# Altium PCB Receptorpcb.PcbDoc
Units mil, origin at the board's own origin, x right, y up, seen from the top; angles counter-clockwise.
Board outline 3200 x 1900 mil, 2 copper layers (Top Layer, Bottom Layer); 11 components, 11 nets, 41 pads, 0 vias.
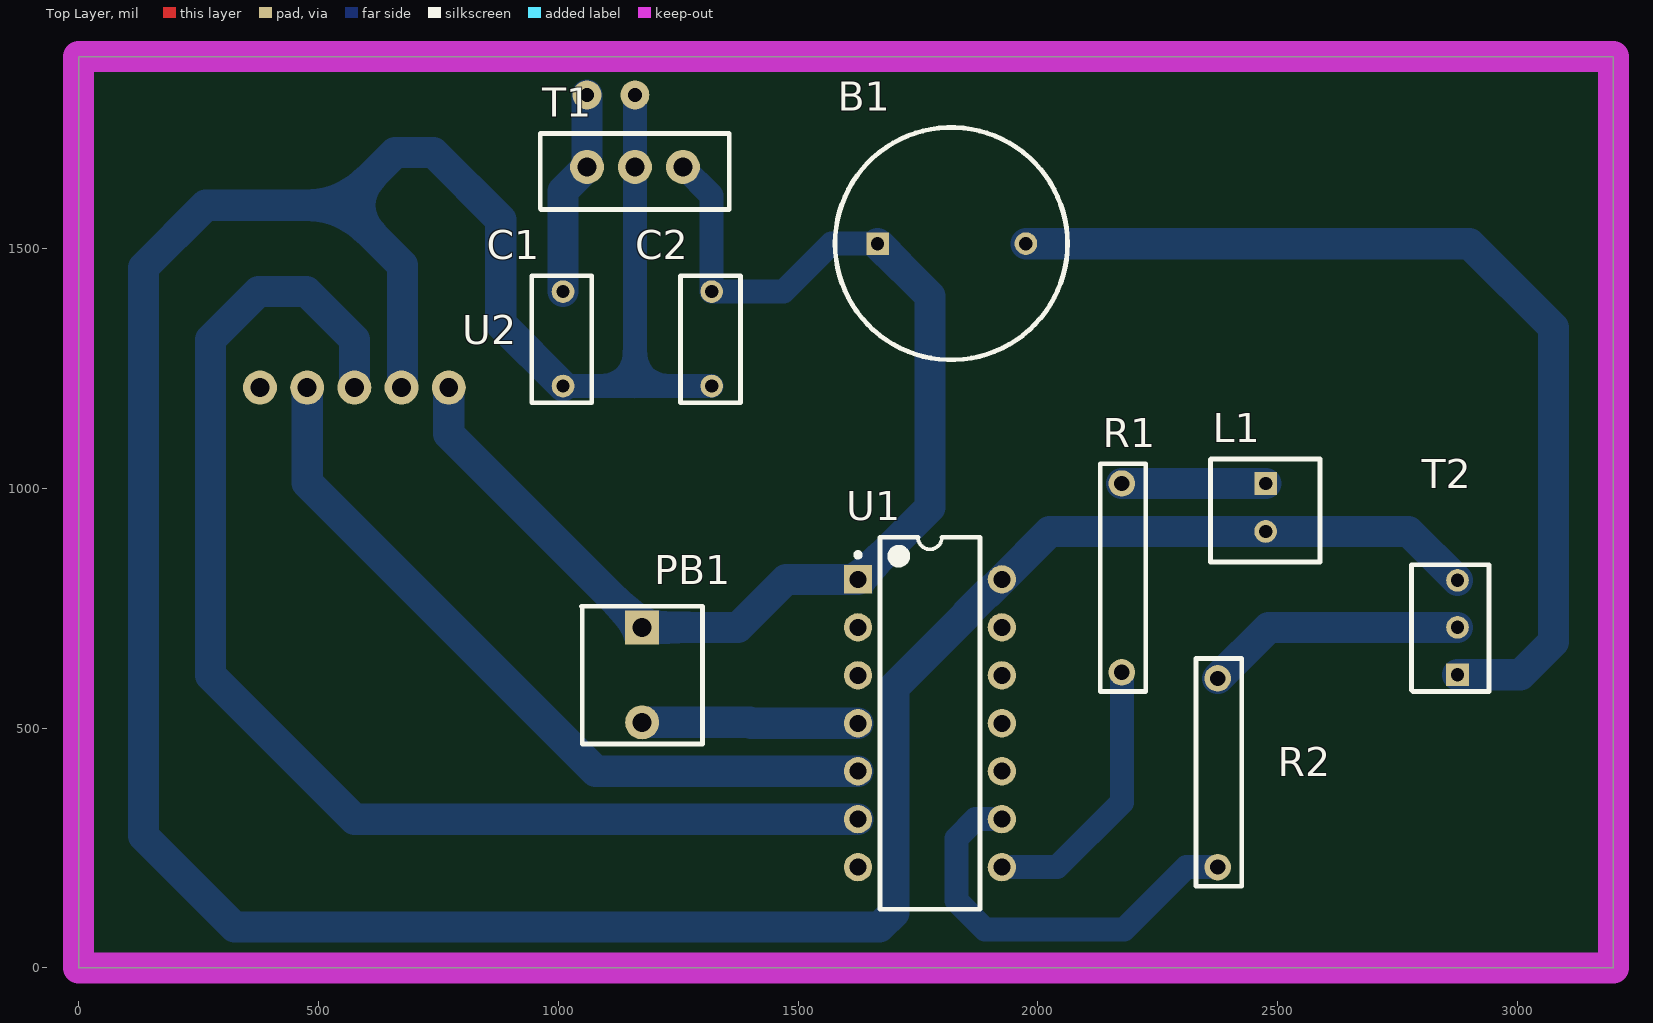
[diagram p0: Top Layer view]
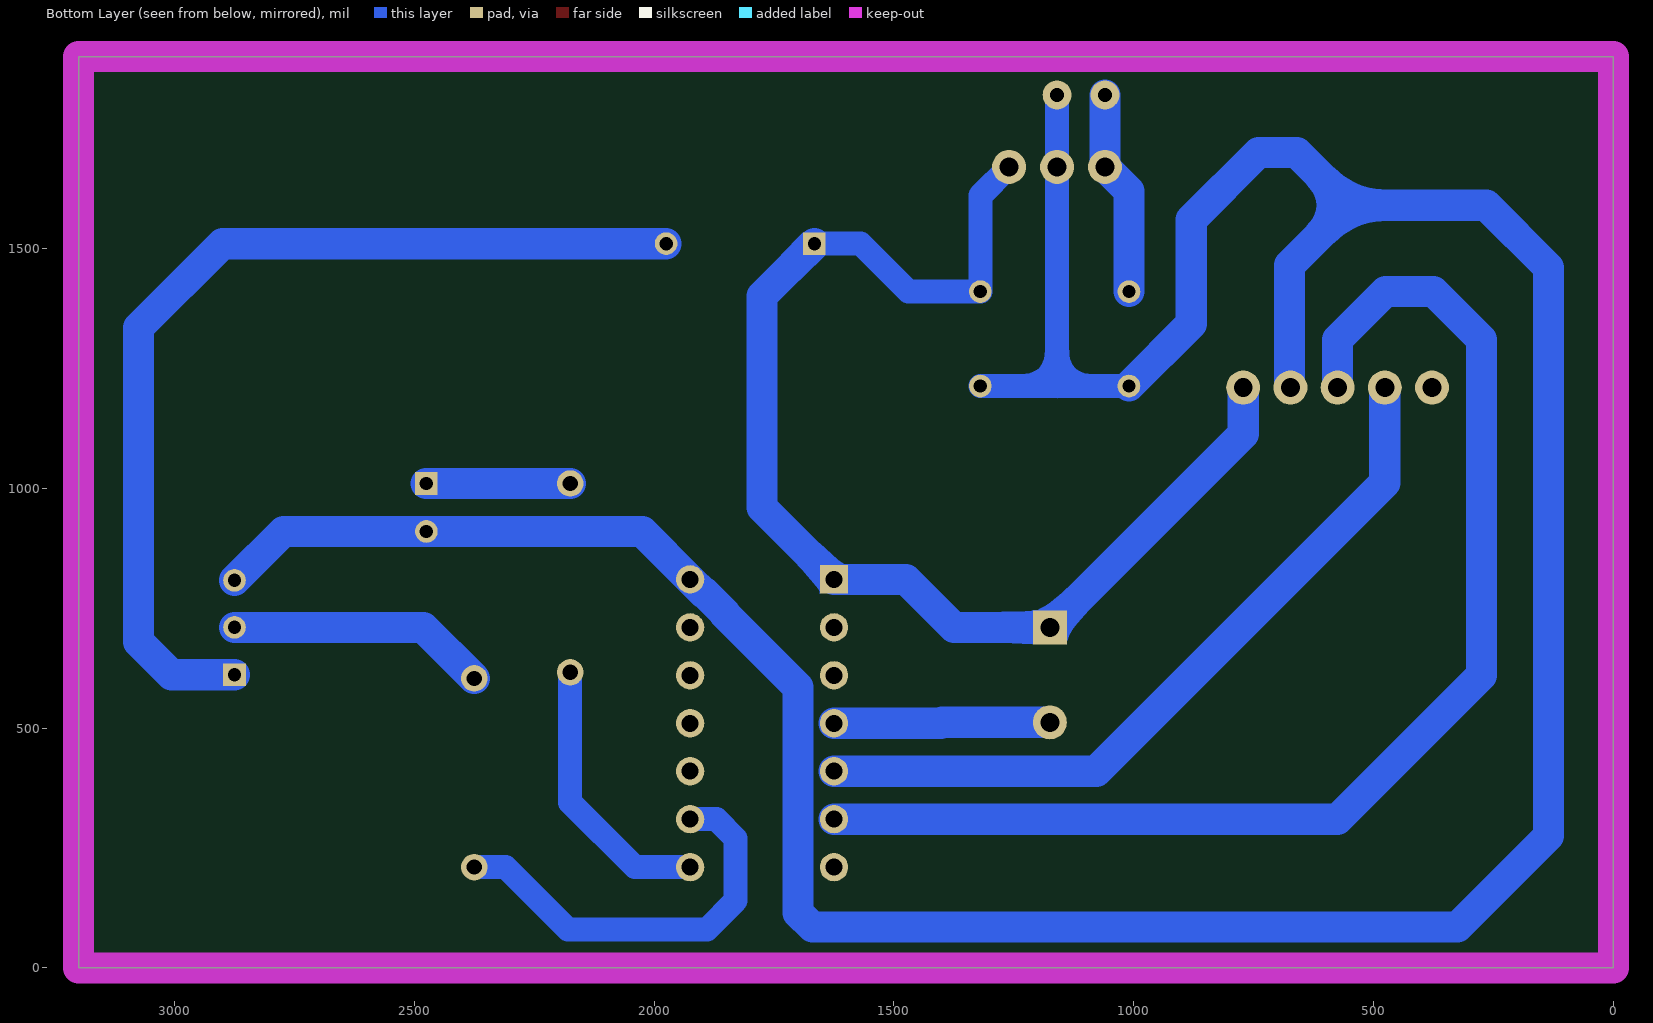
[diagram p1: Bottom Layer view, seen from below]
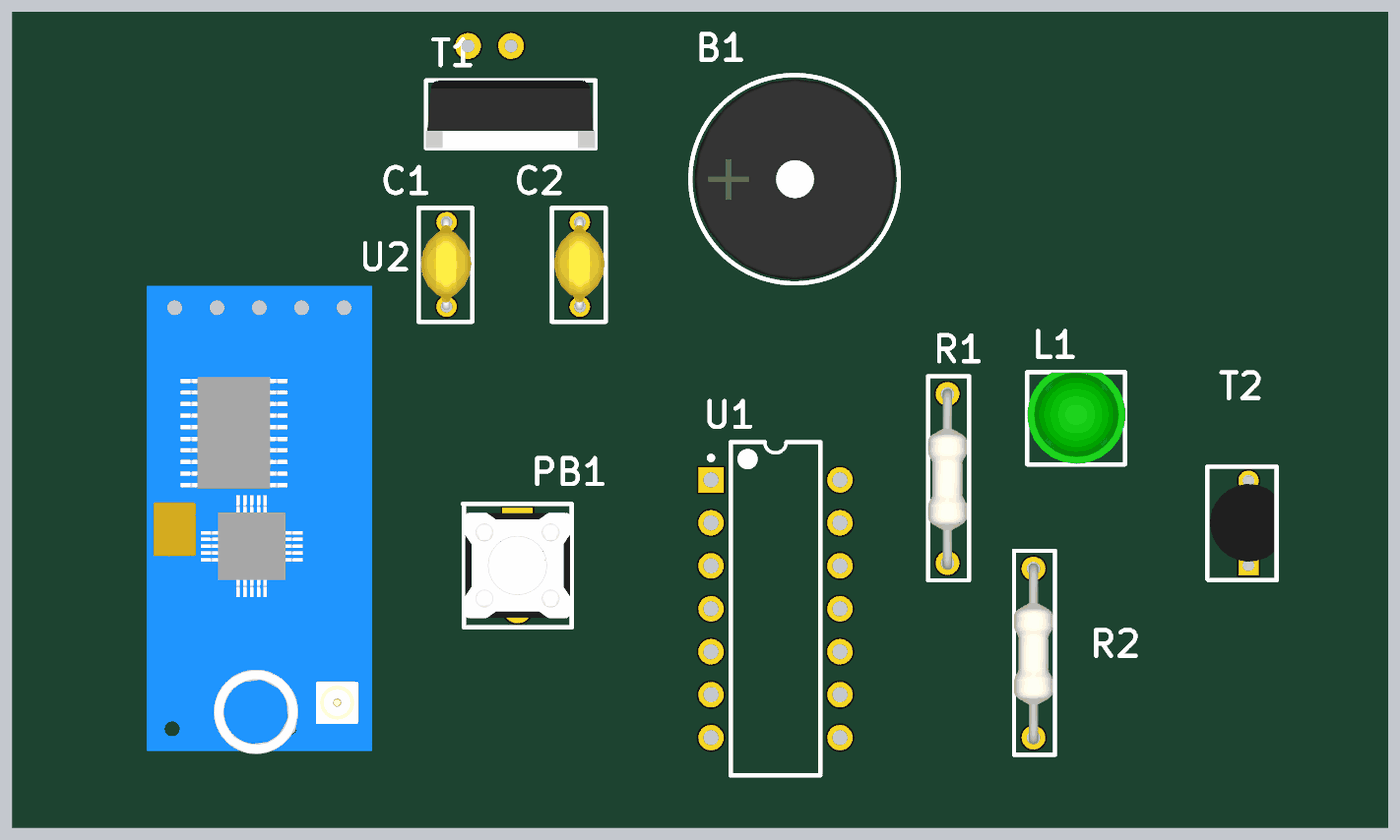
[diagram p2: 3D render of the assembled board from above, using the file's embedded part models]

## Layer stack, top to bottom
Top Solder: solder mask 0.4, Solder Resist, Dk 3.5
Top Layer: signal copper 1.4
Dielectric 1: dielectric 12.6, FR-4, Dk 4.8
Bottom Layer: signal copper 1.4
Bottom Solder: solder mask 0.4, Solder Resist, Dk 3.5

## Board outline
0,0 3200,0 3200,1900 0,1900

## Design rules (kind name [scope] priority, off if disabled: settings)
Clearance [All] p1: gap=10 ignorepadtopadclearanceinfootprint=FALSE
Height [All] p1: minheight=0 maxheight=1500 prefheight=500
PolygonConnect [All] p1: connectstyle=Relief reliefconductorwidth=10 reliefentries=4 polygonreliefangle="90 Angle" airgapwidth=10
RoutingLayers [All] p1: top layer_v5=FALSE bottom layer_v5=TRUE
RoutingVias [All] p1: holewidth=28 width=50 viastyle="Through Hole" minholewidth=28 minwidth=50 maxholewidth=28 maxwidth=50
SolderMaskExpansion [All] p1: expansion=4
UnRoutedNet [All] p1: checkbadconnections=TRUE
Width [All] p1: maxlimit=70 minlimit=50 preferedwidth=65
27 further rules are at their usual default settings.

## Components (designator, comment, footprint, x,y, rotation, side; value= is the part's Value field where it differs from the comment)
B1 "BUZZER" Buzzer 1665.94,1510 r0 top
C1 "Cap" RAD-0.3 1010,1213.15 r90 top value=100pF
C2 "Cap" RAD-0.3 1320,1213.15 r90 top value=100pF
L1 "LED" LED 2475,1010 r0 top
PB1 "Push Button 2-Pin" "Push Button" 1175,710 r0 top
R1 "Res1" AXIAL-0.3 2175,616.3 r90 top value=1K
R2 "Res1" AXIAL-0.3 2375,210 r90 top value=1K
T1 "LM7805" LM7805 1060,1670 r180 top
T2 "Transistor" 2N2222a 2875,611.19 r90 top
U1 "PIC16F688-I/P" PDIP300-P14 1775,510 r0 top
U2 "RF module" HC-12 378.15,1210 r0 top

## Footprints (in the part's own frame and the unit in brackets; to place one, negate y for a bottom-side part, rotate by r counter-clockwise, add the part's x,y. Pads: shape width x height; smd on the part's side, far side on the other; paste and mask are expansions set on the pad)
2N2222a [mm] "Transistor"
  rect 1.2x1.2 hole 0.7: 1(0,0)
  round 1.2 hole 0.7: 33(2.51,0) 34(5,0)
  silkscreen extent -0.88,-1.66 5.83,2.43, body extent -0.24,-1.53 5.26,2.27, height 8.25
AXIAL-0.3 [mm] "Axial Device, Thru-Hole; 2 Leads; 0.3 in Pin Spacing"
  round 1.4 hole 0.8: 1(0,0) 2(10,0)
  silkscreen extent -1.02,-1.27 11.05,1.14, body extent -0.4,-1.15 10.31,1.15, height 2.15
Buzzer [mm] "3.5-12V"
  rect 1.2x1.2 hole 0.7: 1(0,0)
  round 1.2 hole 0.7: 36(7.85,0)
  silkscreen extent -2.26,-6.15 10.06,6.15, body extent -2,-5.92 9.85,5.93, height 9.6
HC-12 [mm] "RF module"
  round 1.8 hole 1: 1(0,0) 2(2.5,0) 3(5,0) 4(7.5,0) 5(10,0)
  body extent -1.66,-26.38 11.64,1.32, height 25.9
LED [mm] "LED"
  rect 1.2x1.2 hole 0.7: 1(0,0)
  round 1.2 hole 0.7: 2(0,-2.54)
  silkscreen extent -2.92,-4.16 2.87,1.29, body extent -2.9,-4.13 2.9,1.27, height 9.2
LM7805 [mm] "Voltage Regulator"
  round 1.8 hole 1: Ground(-2.54,0) Input(0,0) Output(-5.08,0)
  silkscreen extent -7.53,-1.77 2.48,2.25, body extent -7.5,-1.79 2.5,2.22, height 20
PDIP300-P14 [mm] "DIP, 14-Leads, Row Spacing 7.62mm, Pitch 2.54mm, Body 19.2x6.6mm"
  rect 1.5x1.5 hole 0.9: 1(-3.81,7.62)
  round 1.5 hole 0.9: 2(-3.81,5.08) 3(-3.81,2.54) 4(-3.81,0) 5(-3.81,-2.54) 6(-3.81,-5.08) 7(-3.81,-7.62) 8(3.81,-7.62) 9(3.81,-5.08) 10(3.81,-2.54) 11(3.81,0) 12(3.81,2.54) 13(3.81,5.08) 14(3.81,7.62)
  silkscreen extent -3.93,-9.85 2.65,9.85, body extent -3.55,-9.85 3.55,9.85, height 5.34
"Push Button" [mm] "Push button 2 PIN"
  rect 1.8x1.8 hole 1: 1(0,0)
  round 1.8 hole 1: 2(0,-5.03)
  silkscreen extent -3.22,-6.18 3.2,1.12, body extent -3.11,-5.64 3.11,0.6, height 5
RAD-0.3 [mm] "Radial Cap, Thru-Hole; 2 Leads; 0.3 in Pin Spacing"
  round 1.2 hole 0.7: 1(0,0) 2(5,0)
  silkscreen extent -0.89,-1.52 5.84,1.65, body extent -4.19,-1.48 5.26,4.32, height 4.47

## Part data
B1: "Buzzer 3-12V", Frequency=3.6kHz, Manufacturer=Murata, Manufacturer Part Number=PKB24SPCH3601-B0, Max Frequency=4.1kHz, Max Operating Temperature=70°C, Max Supply Current=16mA, Max Supply Voltage=15V, Min Operating Temperature=-20°C, Min Supply Voltage=3V, Nominal Supply Voltage (DC)=12V, Package Quantity=650, Supplier Part Number 1=5168274P, Diameter=24.3mm, Height=9.7mm, Lead Free="Lead Free", Length=24.3mm, Max Supply Voltage (DC)=15V, Min Supply Voltage (DC)=3V, Mount="Flush,PCB,Through Hole", Nominal Supply Current=16mA, Operating Supply Current=16mA, Packaging=Bulk, Radiation Hardening=No, REACH SVHC="No SVHC", Self Resonant Frequency=3.6kHz, Stock 1=0, Supplier 1=RSComponents, Termination="PC Pins", Voltage Rating=12V, Voltage Rating (DC)=15V, Washable=No
C1 C2: "Capacitor Ceramico", Capacitance=100nF, Case/Package=0402, Case Code (Metric)=1005, Dielectric=X5R, Dielectric Material=Ceramic, Manufacturer=KEMET, Manufacturer Part Number=C0402C104K8PACTU, Max Operating Temperature=85°C, Min Operating Temperature=-55°C, Package Quantity=1, Supplier Part Number 1=C0402C104K8PAC7867, Tolerance=10%, Voltage=10V, Case Code (Imperial)=0402, Contact Plating=Matte,Tin, Depth=0.5mm, Dissipation Factor=5%, Height=0.5mm, LatestRevisionDate=17-Jul-2002, LatestRevisionNote="Re-released for DXP Platform.", Lead Free="Lead Free", Lead Pitch=0.3mm, Length=1mm, Mount="PCB,Surface Mount", Number of Pins=2, PackageDescription="Radial Cap, Thru-Hole; 2 Leads; 0.3 in Pin Spacing", PackageReference=RAD-0.3, Packaging="Tape and Reel", Published=8-Jun-2000, Publisher="Altium Limited", Radiation Hardening=No, REACH SVHC="No SVHC", Stock 1=0, Supplier 1=Arrow, Termination=SMD/SMT, Thickness=0.022inch, Voltage Rating=10V, Voltage Rating (DC)=10V, Width=0.02inch
L1: Case/Package=0603, Case Code (Metric)=1608, Colour=Green, Current=1A, Forward Current=30mA, Forward Voltage=2.1V, Lens Colour=Clear,Colorless, Manufacturer="Vishay Lite-On", Manufacturer Part Number=LTST-C190GKT, Max Operating Temperature=85°C, Min Operating Temperature=-55°C, Package Quantity=1, Power Dissipation=100mW, Reverse Voltage=5V, Supplier Part Number 1=859-LTST-C190GKT, Test Current=10mA, Voltage=2V, Case Code (Imperial)=0603, Depth=0.8mm, Dominant Wavelength=569nm, Height=0.8mm, Illumination Colour=Green, Lead Free="Lead Free", Length=1.6mm, Lens Style=Clear,Colorless,Diffused,Rectangular, Lens Transparency=Clear, Luminous Intensity=6mcd, Mount="Surface Mount", Number of Elements=1, Number of LEDs=1, Number of Pins=2, Packaging="Tape and Reel", Power Rating=100mW, Pricing 1="1=0.25, 10=0.13, 50=0.13, 100=0.061, 1000=0.045, 10000=0.034 (USD)", Radiation Hardening=No, Stock 1=402291, Supplier 1=Mouser, Viewing Angle=130°, Wavelength=565nm, Width=0.8mm
PB1: library part "Push button", Colour=Black, Manufacturer="ITT C&K", Manufacturer Part Number=G003A, Package Quantity=500, Supplier Part Number 1=611-G003A, Diameter=6.2mm, Height=9.04mm, Illumination Colour=Black, Illumination Type=Non-Illuminated, Lead Free="Lead Free", Packaging=Bulk, Pricing 1="1=0.44, 10=0.44, 50=0.425, 100=0.416, 1000=0.296, 10000=0.28 (USD)", Radiation Hardening=No, Shape=Round, Stock 1=2542, Supplier 1=Mouser
R1 R2: "Resistor", LatestRevisionDate=17-Jul-2002, LatestRevisionNote="Re-released for DXP Platform.", PackageDescription="Axial Device, Thru-Hole; 2 Leads; 0.3 in Pin Spacing", PackageReference=AXIAL-0.3, Published=8-Jun-2000, Publisher="Altium Limited"
T1: "Voltage Regulator", Case/Package=TO-220-3, Current Rating=1A, Dropout Voltage=2V, Manufacturer="ON Semiconductor / Fairchild", Manufacturer Part Number=LM7805CT, Max Input Voltage=35V, Max Operating Temperature=125°C, Max Output Voltage=5.2V, Min Input Voltage=7V, Min Operating Temperature=-40°C, Min Output Voltage=5V, Output Voltage Accuracy=4%, Package Quantity=50, Power Supply Rejection Ratio (PSRR)=73dB, Quiescent Current=8mA, Supplier Part Number 1=34C1092, Accuracy=4%, Height=16.3mm, Lead Free="Lead Free", Length=10.67mm, Max Output Current=1A, Mount="Through Hole", Nominal Output Voltage=5V, Number of Outputs=1, Number of Pins=3, Number of Regulators=1, Output Current=1A, Output Type=Fixed, Output Voltage=5V, Packaging=Rail/Tube, Polarity=Positive, Radiation Hardening=No, REACH SVHC="No SVHC", Stock 1=0, Supplier 1=Newark, Weight=1.214g, Width=4.7mm
T2: library part 2N2222A, Case/Package=TO-18, Collector Emitter Breakdown Voltage=40V, Manufacturer="NTE Electronics", Max Operating Temperature=200°C, Max Power Dissipation=1.2W, Supplier Part Number 1=70725575, Transition Frequency=300MHz, Collector Emitter Voltage (VCEO)=40V, Lead Free="Contains Lead", Manufacturer Part Number=2N2222A, Number of Pins=3, Polarity=NPN, Pricing 1="1=0.48 (USD)", REACH SVHC="No SVHC", Stock 1=4414, Supplier 1="Allied Electronics"
U1: "FLASH-Based 8-Bit CMOS Microcontroller, 10-Bit A/D, 4K (x14-Bit words) FLASH, 256 Bytes SRAM, 14-Pin PDIP, Industrial Temperature", Supplier Part Number 1=PIC16F688-I/P-ND, ComponentLink1Description=Datasheet, ComponentLink1URL=http://ww1.microchip.com/downloads/en/DeviceDoc/41203D.pdf, ComponentLink2Description="Packaging Specification", ComponentLink2URL=http://www.microchip.com/stellent/groups/techpub_sg/documents/packagingspec/en012702.pdf, ComponentLink3Description="Microchip.com Home", ComponentLink3URL=http://www.microchip.com/, DatasheetVersion="revD, Feb-2007", LatestRevisionDate=29-Jan-2009, LatestRevisionNote="Sch. layout revised. 3D Model Removed.", PackageDescription="14-Lead Plastic Dual In-Line (P) - 300 mil Body [PDIP]", PackageReference=PDIP300-P14, PackageVersion="revBB, Aug-2009", Published=11-Oct-2004, Publisher="Altium Limited", Supplier 1=Digi-Key
U2: library part HC-12, "HC-11 1000m", Case/Package=Module, Current - Receiving=3mA, Current - Transmitting=25mA, Frequency=870MHz, Manufacturer=Microchip, Manufacturer Part Number=MRF89XAM8A-I/RM, Max Operating Temperature=85°C, Max Supply Voltage=3.6V, Min Operating Temperature=-40°C, Min Supply Voltage=2.1V, Operating Supply Current=18mA, Operating Supply Voltage=3.3V, Package Quantity=54, Supplier Part Number 1=2496484, Contact Plating=Matte,Tin, Data Rate=40Kbps, Depth=17.78mm, Height=0.075inch, Interface=SPI, Lead Free="Lead Free", Length=27.94mm, Logic Function=Transceiver, Max Frequency=870MHz, Mount="Surface Mount", Nominal Supply Current=25mA, Number of Channels=59, Number of Drivers=1, Number of Pins=12, Number of Receivers=1, Number of Transceivers=1, Number of Transmitters=1, Packaging=Tray, Pricing 1="1=49.59, 5=48.04, 10=47.12, 25=40.3 (GBP)", Propagation Delay=25ns, Radiation Hardening=No, REACH SVHC="No SVHC", Sensitivity=-113dBm, Simplex/Duplex="Half Duplex", Stock 1=13, Supplier 1=Farnell, Weight=0.004706oz, Width=0.7inch

## Free pads (board coordinates)
  round 60 hole 30: 2(1160,1820) 3(1060,1820)

## Nets (pads, with @x,y where several pads share a name; then routed paths per layer and width w, separated by ;. In a path a pad name is that pad's centre, name@x,y a point inside that pad or via, vN(x,y) a via of type N, cw(c..) or ccw(c..) an arc to the next point about the centre after c; other vN are vias at no path point)
GND: C1.1 C2.1 L1.2 pad.2 T1.Ground T2.34 U1.14 U2.4 | length 7316.4
  Bottom Layer w50: C1.1 1160,1213.15 ; pad.2 T1.Ground 1160,1213.15 ; C2.1 1160,1213.15
  Bottom Layer w65: U2.4 675,1211.57 675,1465 550,1590 ; C1.1 880,1343.15 880,1560 740,1700 660,1700 550,1590 ; T2.34 2773.04,910 L1.2 2025,910 U1.14 1897.03,782.03 1895.17,782.03 1852.97,739.83 1852.97,737.97 1700,585 1700,115 1670,85 325,85 135,275 135,1460 265,1590 550,1590
NetB1_1: B1.1 C2.2 PB1.1 T1.Output U1.1 U2.5 | length 2637.9
  Bottom Layer w50: T1.Output 1320,1610 C2.2 1470,1410 1570,1510 B1.1
  Bottom Layer w65: U2.5 771.85,1113.15 PB1.1 1375,710 1475,810 U1.1 1775,960 1775,1400.94 B1.1
NetB1_36: B1.36 T2.1 | length 2056
  Bottom Layer w65: B1.36 2900,1510 3075,1335 3075,680 3006.19,611.19 T2.1
NetC1_2: C1.2 pad.3 T1.Input | length 430.7
  Bottom Layer w65: C1.2 1010,1620 T1.Input pad.3
NetL1_1: L1.1 R1.2 | length 300
  Bottom Layer w65: R1.2 L1.1
NetPB1_2: PB1.2 U1.4 | length 450.8
  Bottom Layer w65: PB1.2 1400,511.97 1401.97,510 U1.4
NetR1_1: R1.1 U1.8 | length 577.2
  Bottom Layer w50: U1.8 2040,210 2175,345 R1.1
NetR2_1: R2.1 U1.9 | length 865.3
  Bottom Layer w50: U1.9 1870,310 1830,270 1830,140 1890,80 2180,80 2310,210 R2.1
NetR2_2: R2.2 T2.33 | length 544
  Bottom Layer w65: R2.2 2481.3,710 T2.33
NetU1_5: U1.5 U2.2 | length 1596
  Bottom Layer w65: U2.2 476.58,1011.58 1078.15,410 U1.5
NetU1_6: U1.6 U2.3 | length 2657.1
  Bottom Layer w65: U2.3 575,1310 475,1410 375,1410 275,1310 275,610 575,310 1050,310 U1.6
pads on no net: U1.2 U1.3 U1.7 U1.10 U1.11 U1.12 U1.13 U2.1

## Keep-outs
Keep-Out Layer:
  the board outline again, w65